# Altium PCB 普通.pcbdoc
Units mil, origin at the board's own origin, x right, y up, seen from the top; angles counter-clockwise.
Board outline 3395 x 5025 mil, 2 copper layers (Top Layer, Bottom Layer); 51 components, 41 nets, 100 pads, 0 vias.
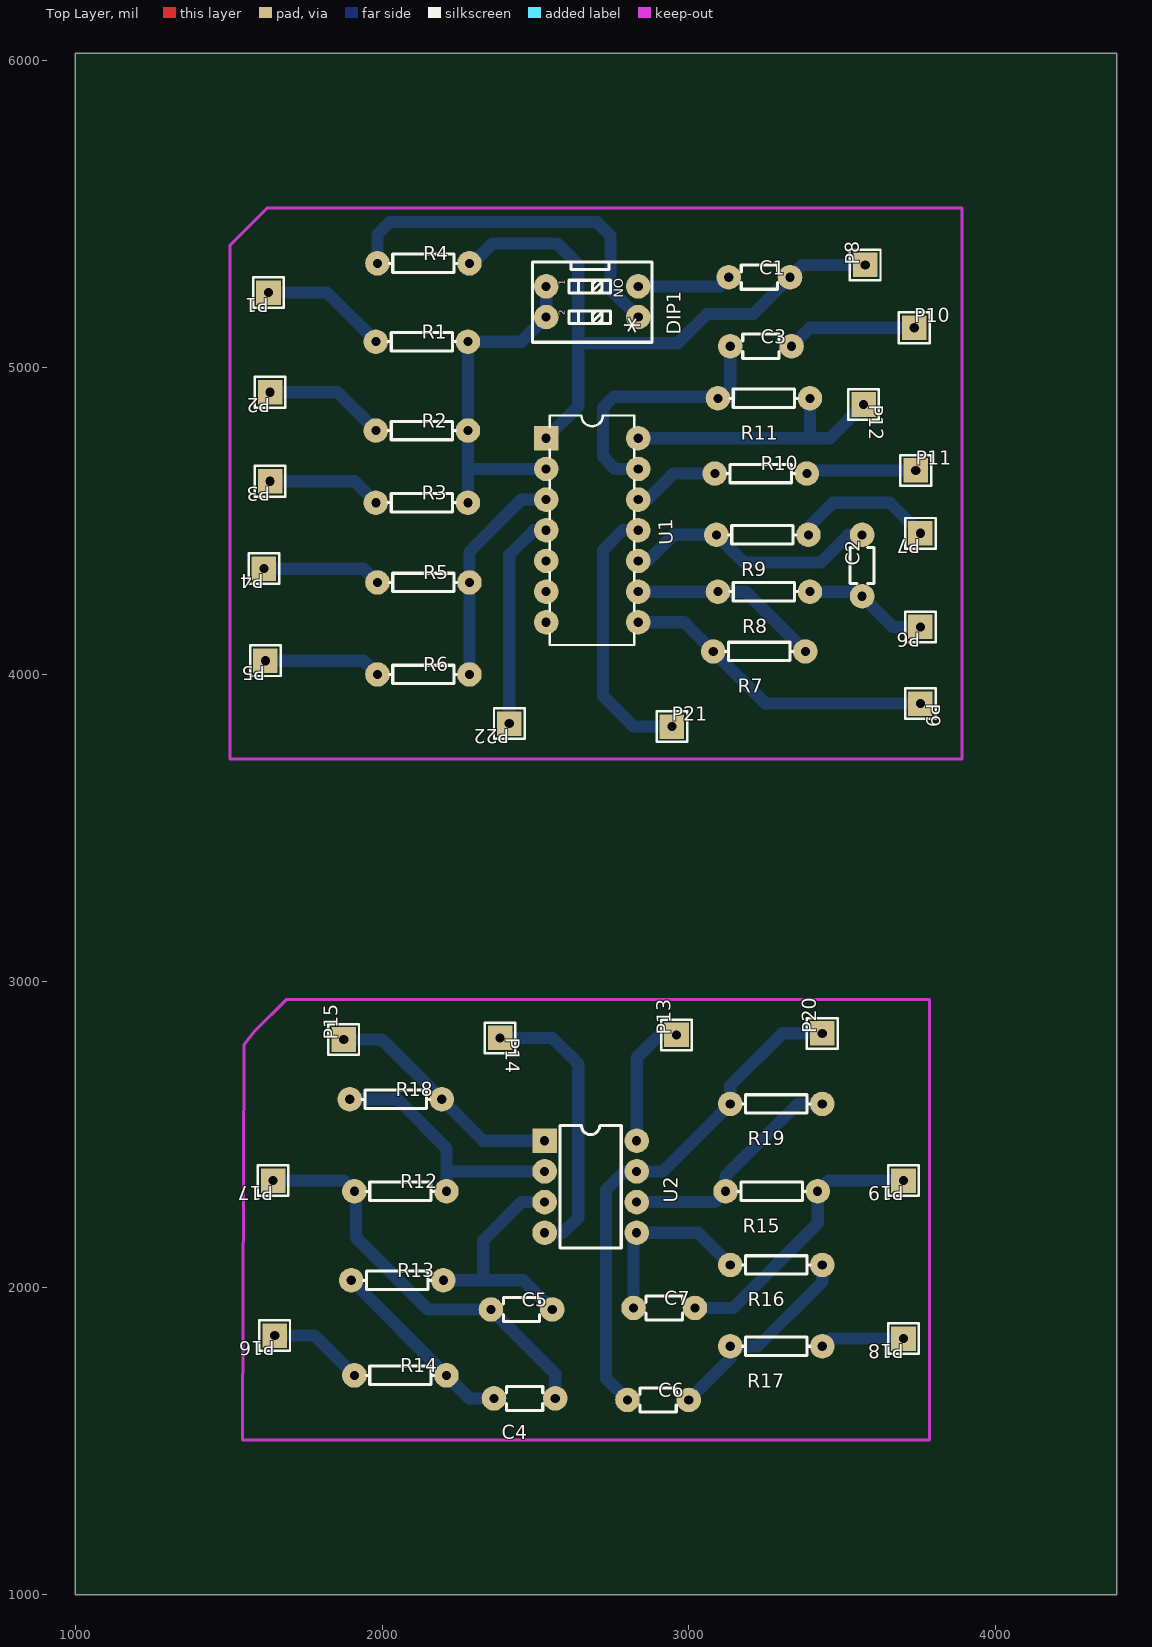
[diagram p0: Top Layer view]
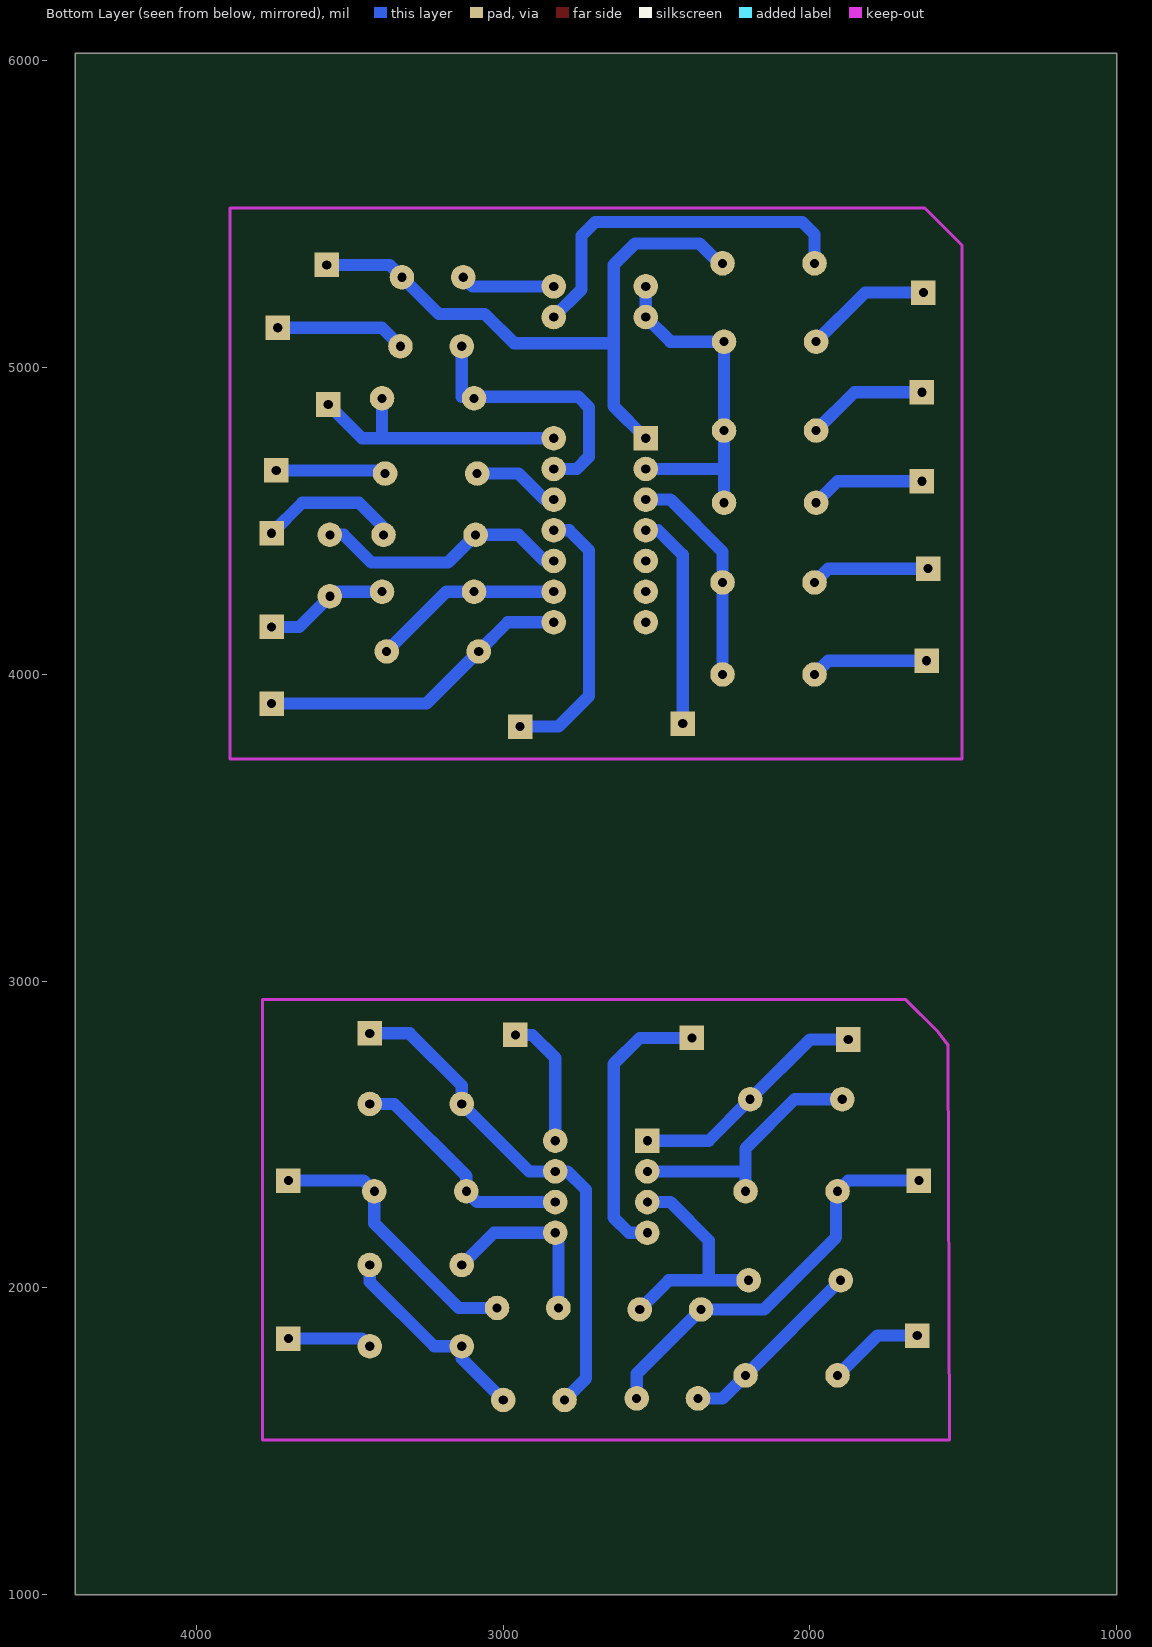
[diagram p1: Bottom Layer view, seen from below]

## Layer stack, top to bottom
Top Layer: signal copper (thickness not stored)
Dielectric: dielectric 12.6, FR-4, Dk 4.8
Bottom Layer: signal copper (thickness not stored)

## Board outline
4395,1000 1000,1000 1000,6025 4395,6025

## Components (designator, comment, footprint, x,y, rotation, side; value= is the part's Value field where it differs from the comment)
C1 "104" CAP-TH_L3.0-W2.0-P5.08-D0.7 3230,5295 r0 top
C2 "103" CAP-TH_L3.0-W2.0-P5.08-D0.7 3565,4355 r90 top
C3 "105" CAP-TH_L3.0-W2.0-P5.08-D0.7 3235,5070 r0 top
C4 "11" CAP-TH_L3.0-W2.0-P5.08-D0.7 2465,1640 r180 top
C5 "11" CAP-TH_L3.0-W2.0-P5.08-D0.7 2455,1930 r0 top
C6 "11" CAP-TH_L3.0-W2.0-P5.08-D0.7 2900,1635 r0 top
C7 "11" CAP-TH_L3.0-W2.0-P5.08-D0.7 2920,1935 r0 top
DIP1 "11" VDG-02HG-R 2685,5215 r270 top
P1 "11" HDR-1X1/2.54 1630,5245 r180 top
P2 "11" HDR-1X1/2.54 1635,4920 r180 top
P3 "11" HDR-1X1/2.54 1635,4630 r180 top
P4 "11" HDR-1X1/2.54 1615,4345 r180 top
P5 "11" HDR-1X1/2.54 1620,4045 r180 top
P6 "11" HDR-1X1/2.54 3755,4155 r180 top
P7 "11" HDR-1X1/2.54 3755,4460 r180 top
P8 "11" HDR-1X1/2.54 3575,5335 r90 top
P9 "11" HDR-1X1/2.54 3755,3905 r270 top
P10 "11" HDR-1X1/2.54 3735,5130 r0 top
P11 "11" HDR-1X1/2.54 3740,4665 r0 top
P12 "11" HDR-1X1/2.54 3570,4880 r270 top
P13 "11" HDR-1X1/2.54 2960,2825 r90 top
P14 "11" HDR-1X1/2.54 2385,2815 r270 top
P15 "11" HDR-1X1/2.54 1875,2810 r90 top
P16 "11" HDR-1X1/2.54 1650,1845 r180 top
P17 "11" HDR-1X1/2.54 1645,2350 r180 top
P18 "11" HDR-1X1/2.54 3700,1835 r180 top
P19 "11" HDR-1X1/2.54 3700,2350 r180 top
P20 "11" HDR-1X1/2.54 3435,2830 r90 top
P21 "11" HDR-1X1/2.54 2945,3830 r0 top
P22 "11" HDR-1X1/2.54 2415,3840 r180 top
R1 "100k" AXIAL-0.3 2130,5085 r0 top
R2 "20k" AXIAL-0.3 2130,4795 r0 top
R3 "500" AXIAL-0.3 2130,4560 r0 top
R4 "100k-" AXIAL-0.3 2135,5340 r0 top
R5 "20k" AXIAL-0.3 2135,4300 r0 top
R6 "10k" AXIAL-0.3 2135,4000 r0 top
R7 "100k" AXIAL-0.3 3230,4075 r180 top
R8 "10k" AXIAL-0.3 3245,4270 r180 top
R9 "10k" AXIAL-0.3 3240,4455 r180 top
R10 "10k" AXIAL-0.3 3235,4655 r0 top
R11 "100k" AXIAL-0.3 3245,4900 r180 top
R12 "11" AXIAL-0.3 2060,2315 r0 top
R13 "NO" AXIAL-0.3 2050,2025 r0 top
R14 "11" AXIAL-0.3 2060,1715 r0 top
R15 "11" AXIAL-0.3 3270,2315 r180 top
R16 "11" AXIAL-0.3 3285,2075 r180 top
R17 "11" AXIAL-0.3 3285,1810 r180 top
R18 "11" AXIAL-0.3 2045,2615 r0 top
R19 "11" AXIAL-0.3 3285,2600 r180 top
U1 "11" DIP-14_L19.0-W7.0-P2.54-LS7.6-BL 2685,4470 r270 top
U2 "LM358NG" DIP-8_L9.7-W6.4-P2.54-LS7.6-BL 2680,2330 r270 top

## Footprints (in the part's own frame and the unit in brackets; to place one, negate y for a bottom-side part, rotate by r counter-clockwise, add the part's x,y. Pads: shape width x height; smd on the part's side, far side on the other; paste and mask are expansions set on the pad)
AXIAL-0.3 [mil]
  round 80 hole 30: 1(-150,0) 2(150,0)
  silkscreen extent -110,-30 110,30
CAP-TH_L3.0-W2.0-P5.08-D0.7 [mil]
  round 80 hole 30: 1(-100,0) 2(100,0)
  silkscreen extent -59,-39 59,39
DIP-8_L9.7-W6.4-P2.54-LS7.6-BL [mil]
  rect 80x80 hole 30: 1(-150,-150)
  round 80 hole 30: 2(-50,-150) 3(50,-150) 4(150,-150) 5(150,150) 6(50,150) 7(-50,150) 8(-150,150)
  silkscreen extent -200,-100 200,100
DIP-14_L19.0-W7.0-P2.54-LS7.6-BL [mil]
  rect 80x80 hole 30: 1(-300,-150)
  round 80 hole 30: 2(-200,-150) 3(-100,-150) 4(0,-150) 5(100,-150) 6(200,-150) 7(300,-150) 8(300,150) 9(200,150) 10(100,150) 11(0,150) 12(-100,150) 13(-200,150) 14(-300,150)
  silkscreen extent -374,-138 374,138
HDR-1X1/2.54 [mil]
  rect 80x80 hole 30: 1(0,0)
  silkscreen extent -50,-50 50,50
VDG-02HG-R [mil]
  round 80 hole 30: 1(-50,-150) 2(50,-150) 3(50,150) 4(-50,150)
  silkscreen extent -130,-195 132,195

## Nets (pads, with @x,y where several pads share a name; then routed paths per layer and width w, separated by ;. In a path a pad name is that pad's centre, name@x,y a point inside that pad or via, vN(x,y) a via of type N, cw(c..) or ccw(c..) an arc to the next point about the centre after c; other vN are vias at no path point)
C1_1: C1.1 DIP1.4 | length 307.4
  Bottom Layer w40: DIP1.4 3100,5265 C1.1
C2_1: C2.1 P6.1 R8.1 | length 407.6
  Bottom Layer w40: R8.1 3550,4270 C2.1 3665,4155 P6.1
C3_2: C3.2 P10.1 | length 424.9
  Bottom Layer w40: C3.2 3395,5130 P10.1
C4_1: C4.1 C5.1 P17.1 R12.1 | length 1345.9
  Bottom Layer w40: P17.1 1875.01,2350 R12.1 1915,2310.01 1915,2165 2150,1930 C5.1 2565.01,1719.99 C4.1
C4_2: C4.2 R13.1 R14.2 | length 624.5
  Bottom Layer w40: R13.1 R14.2 2285.01,1640 C4.2
C5_2: C5.2 R13.2 U2.3 | length 776.1
  Bottom Layer w40: R13.2 2459.99,2025.01 C5.2 ; 2330,2025.01 2330,2155 2455,2280 U2.3
C6_1: C6.1 P20.1 R19.2 U2.7 | length 1665.4
  Bottom Layer w40: C6.1 2730,1704.99 2730,2320 2790,2380 U2.7 2915,2380 R19.2 3135,2660 3305.01,2830.01 P20.1
C6_2: C6.2 R16.1 R17.2 | length 672.9
  Bottom Layer w40: C6.2 3135,1770 R17.2 3224.99,1809.99 3435,2020 R16.1
C7_1: C7.1 R16.2 U2.5 | length 597.6
  Bottom Layer w40: C7.1 2820.01,2170.01 U2.5 3029.99,2180 R16.2
C7_2: C7.2 P19.1 R15.1 | length 913.4
  Bottom Layer w40: C7.2 3145,1935 3420,2210 R15.1 3455.01,2350 P19.1
null: 
P13_1: P13.1 U2.8 | length 431.1
  Bottom Layer w40: U2.8 2830,2750 2905,2825 P13.1
P14_1: P14.1 U2.4 | length 920.9
  Bottom Layer w40: P14.1 2555,2815 2640,2730 2640,2230 2590,2180 U2.4
R1_1: P1.1 R1.1 | length 416.3
  Bottom Layer w40: P1.1 1820,5245 R1.1
R2_1: P2.1 R2.1 | length 396.8
  Bottom Layer w40: P2.1 1855,4920 R2.1
R3_1: P3.1 R3.1 | length 374
  Bottom Layer w40: P3.1 1910,4630 R3.1
R4_1: DIP1.3 R4.1 | length 1192.5
  Bottom Layer w40: R4.1 1985,5435 2025,5475 2700,5475 2745,5430 2745,5255 DIP1.3
R5_1: P4.1 R5.1 | length 388.6
  Bottom Layer w40: P4.1 1940,4345 R5.1
R6_1: P5.1 R6.1 | length 383.6
  Bottom Layer w40: P5.1 1940,4045 R6.1
R9_1: P7.1 R9.1 | length 464.6
  Bottom Layer w40: R9.1 3390,4480 3470,4560 3655,4560 P7.1
R10_2: P11.1 R10.2 | length 359.1
  Bottom Layer w40: R10.2 3395,4665 P11.1
R12_2: R12.2 R18.1 U2.2 | length 906.3
  Bottom Layer w40: R18.1 2049.99,2615.01 2210,2455 R12.2 2210,2380 U2.2
R14_1: P16.1 R14.1 | length 313.8
  Bottom Layer w40: P16.1 1780.01,1845 R14.1
R15_2: R15.2 R19.1 U2.6 | length 766.8
  Bottom Layer w40: U2.6 3085.01,2280 R15.2 3120,2365 3354.99,2599.99 R19.1
R17_1: P18.1 R17.1 | length 275.4
  Bottom Layer w40: R17.1 3460.01,1835 P18.1
R18_2: P15.1 R18.2 U2.1 | length 791.7
  Bottom Layer w40: P15.1 2000.01,2810 R18.2 2330.01,2480 U2.1
S$93: 
U1_1: C1.2 P8.1 R4.2 U1.1 | length 2136.3
  Bottom Layer w40: R4.2 2295,5340 2360,5405 2570,5405 2640,5335 2640,4875 U1.1 ; 2640,5003.7 2640,5080 2965,5080 3060,5175 3210,5175 C1.2 3370,5335 P8.1
U1_2: DIP1.1 DIP1.2 R1.2 R2.2 R3.2 U1.2 | length 1568.1
  Bottom Layer w40: R2.2 R1.2 ; U1.2 2280,4670 R3.2 R1.2 ; DIP1.1 DIP1.2 2455,5085 R1.2
U1_3: R5.2 R6.2 U1.3 | length 720.4
  Bottom Layer w40: R6.2 R5.2 2285,4400 2455,4570 U1.3
U1_4: P22.1 U1.4 | length 703.1
  Bottom Layer w40: P22.1 2415,4390 2495,4470 U1.4
U1_5: U1.5
U1_6: U1.6
U1_7: U1.7
U1_8: P9.1 R7.2 U1.8 | length 1029.8
  Bottom Layer w40: U1.8 2985,4170 R7.2 3250,3905 P9.1
U1_9: R7.1 R8.2 U1.9 | length 625.8
  Bottom Layer w40: U1.9 R8.2 3185,4270 R7.1
U1_10: C2.2 R9.2 U1.10 | length 839.8
  Bottom Layer w40: U1.10 2865,4370 2950,4455 R9.2 3180,4365 3430,4365 3520,4455 C2.2
U1_11: P21.1 U1.11 | length 883.3
  Bottom Layer w40: U1.11 2785,4470 2720,4405 2720,3930 2820,3830 P21.1
U1_12: R10.1 U1.12 | length 285.2
  Bottom Layer w40: U1.12 2865,4570 2950,4655 R10.1
U1_13: C3.1 R11.2 U1.13 | length 1053.1
  Bottom Layer w40: U1.13 2760,4670 2720,4710 2720,4870 2755,4905 3135,4905 C3.1 ; 2930,4905 3090,4905 R11.2
U1_14: P12.1 R11.1 U1.14 | length 914.8
  Bottom Layer w40: U1.14 3460,4770 P12.1 ; 3384.71,4770 3395,4780.29 R11.1

## Silkscreen, mask and mechanical layers (free items; w line width, h text height)
Document:
  lines w0.1: 2696.5,3511.5 2698.5,3513.5

## Text inside footprints (layer, text, board x,y; h text height)
DIP1: Top Overlay "ON" at 2755.25,5291 h31.5 r270; Top Overlay "1" at 2595.64,5268.8 h19.68 r90; Top Overlay "2" at 2595.84,5170.83 h19.68 r89; Top Overlay "*" at 2761.8,5104.08 h80 r328